# Altium PCB pv-simulator.PCBDOC
Units mm, origin at the board's own origin, x right, y up, seen from the top; angles counter-clockwise.
Board outline 60 x 60 mm, 2 copper layers (Top Layer, Bottom Layer); 122 components, 101 nets, 425 pads, 502 vias.
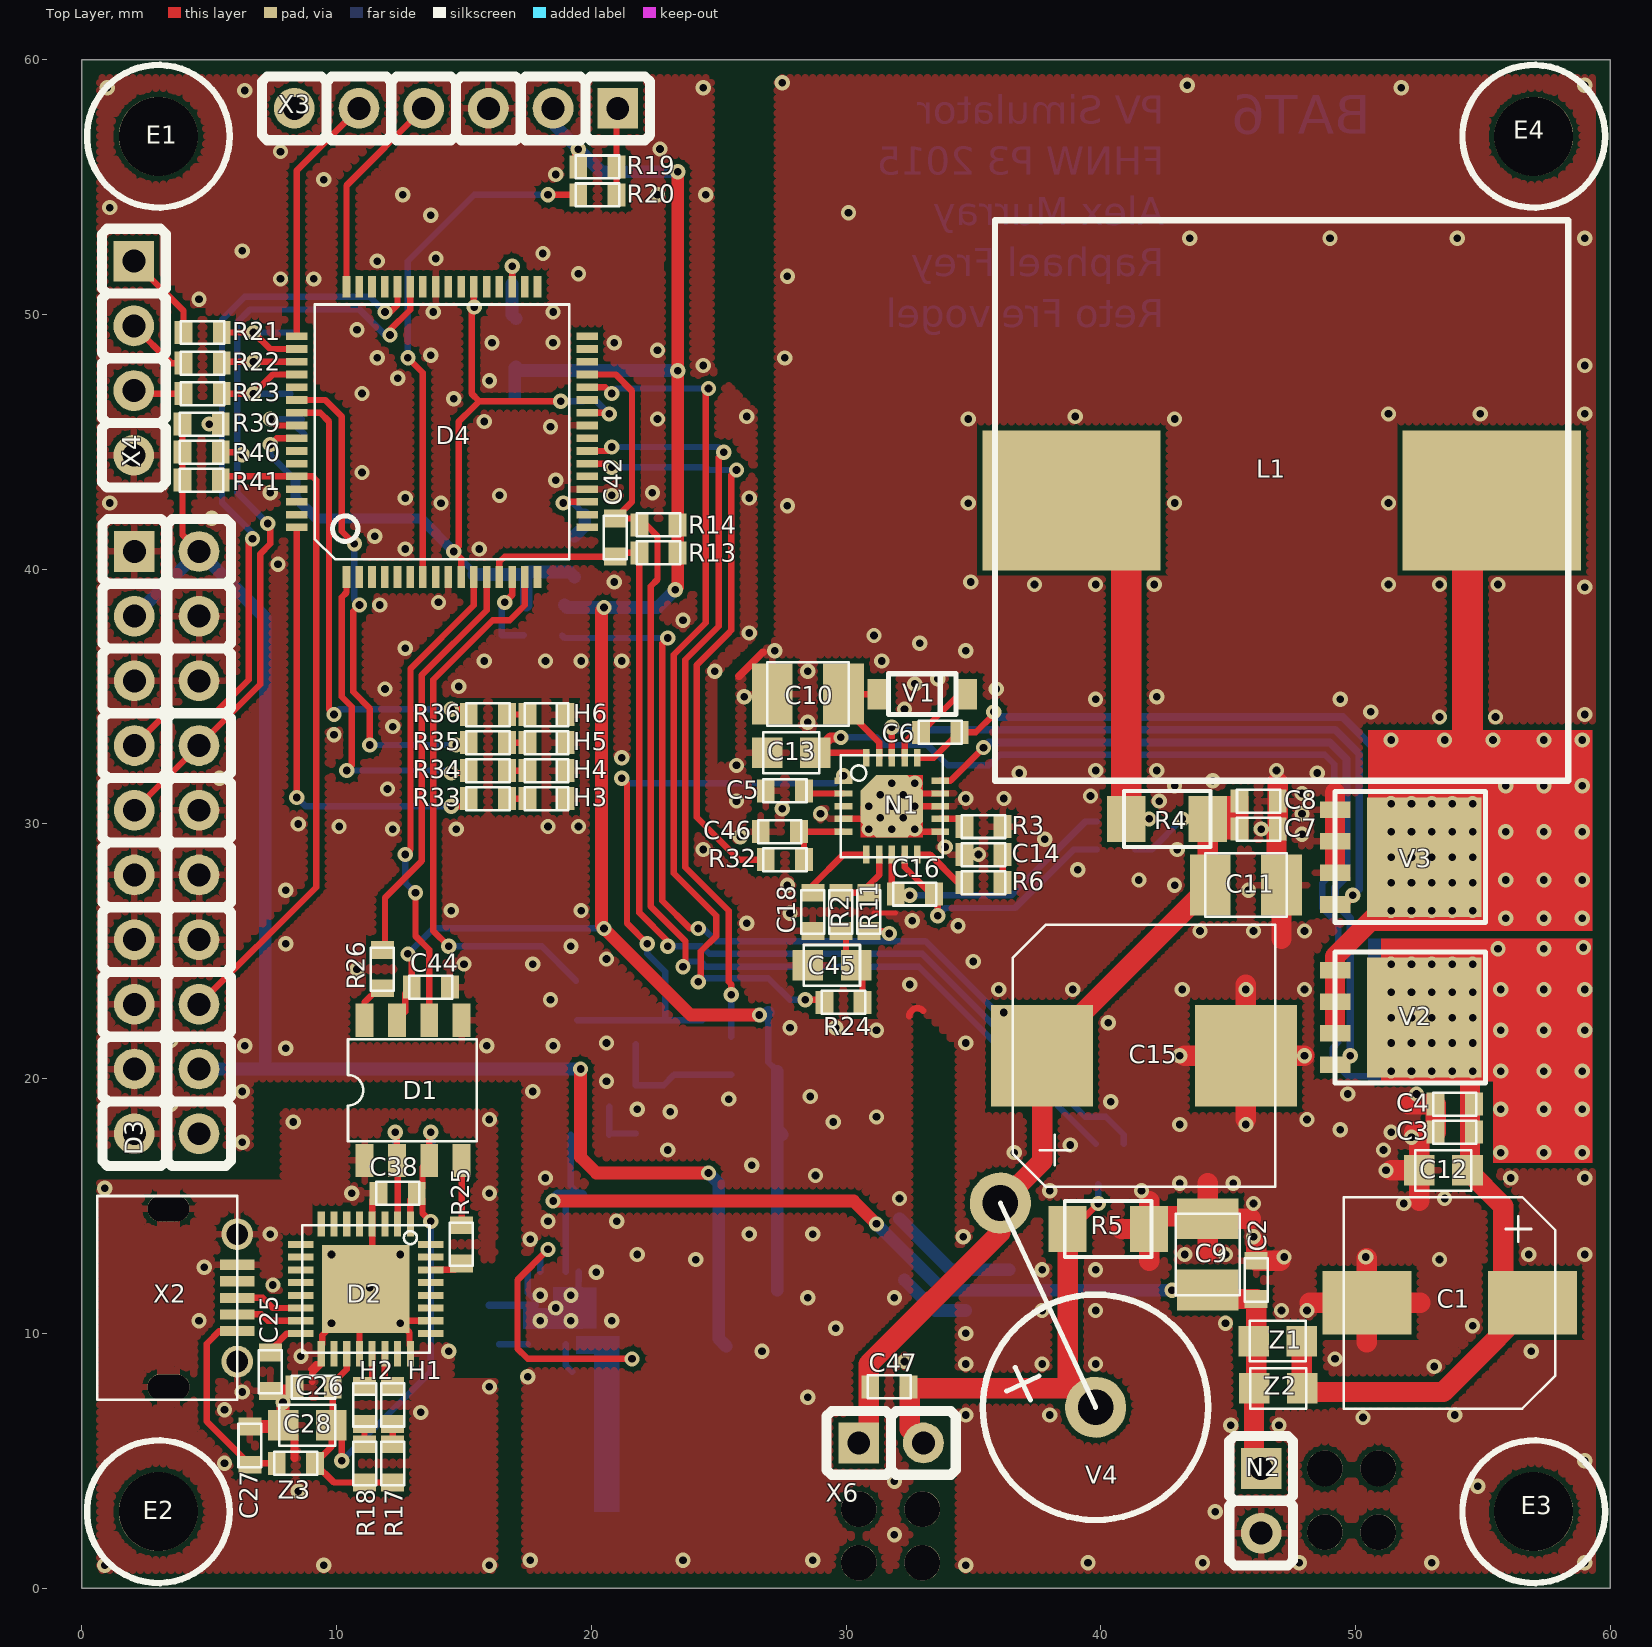
[diagram p0: Top Layer view]
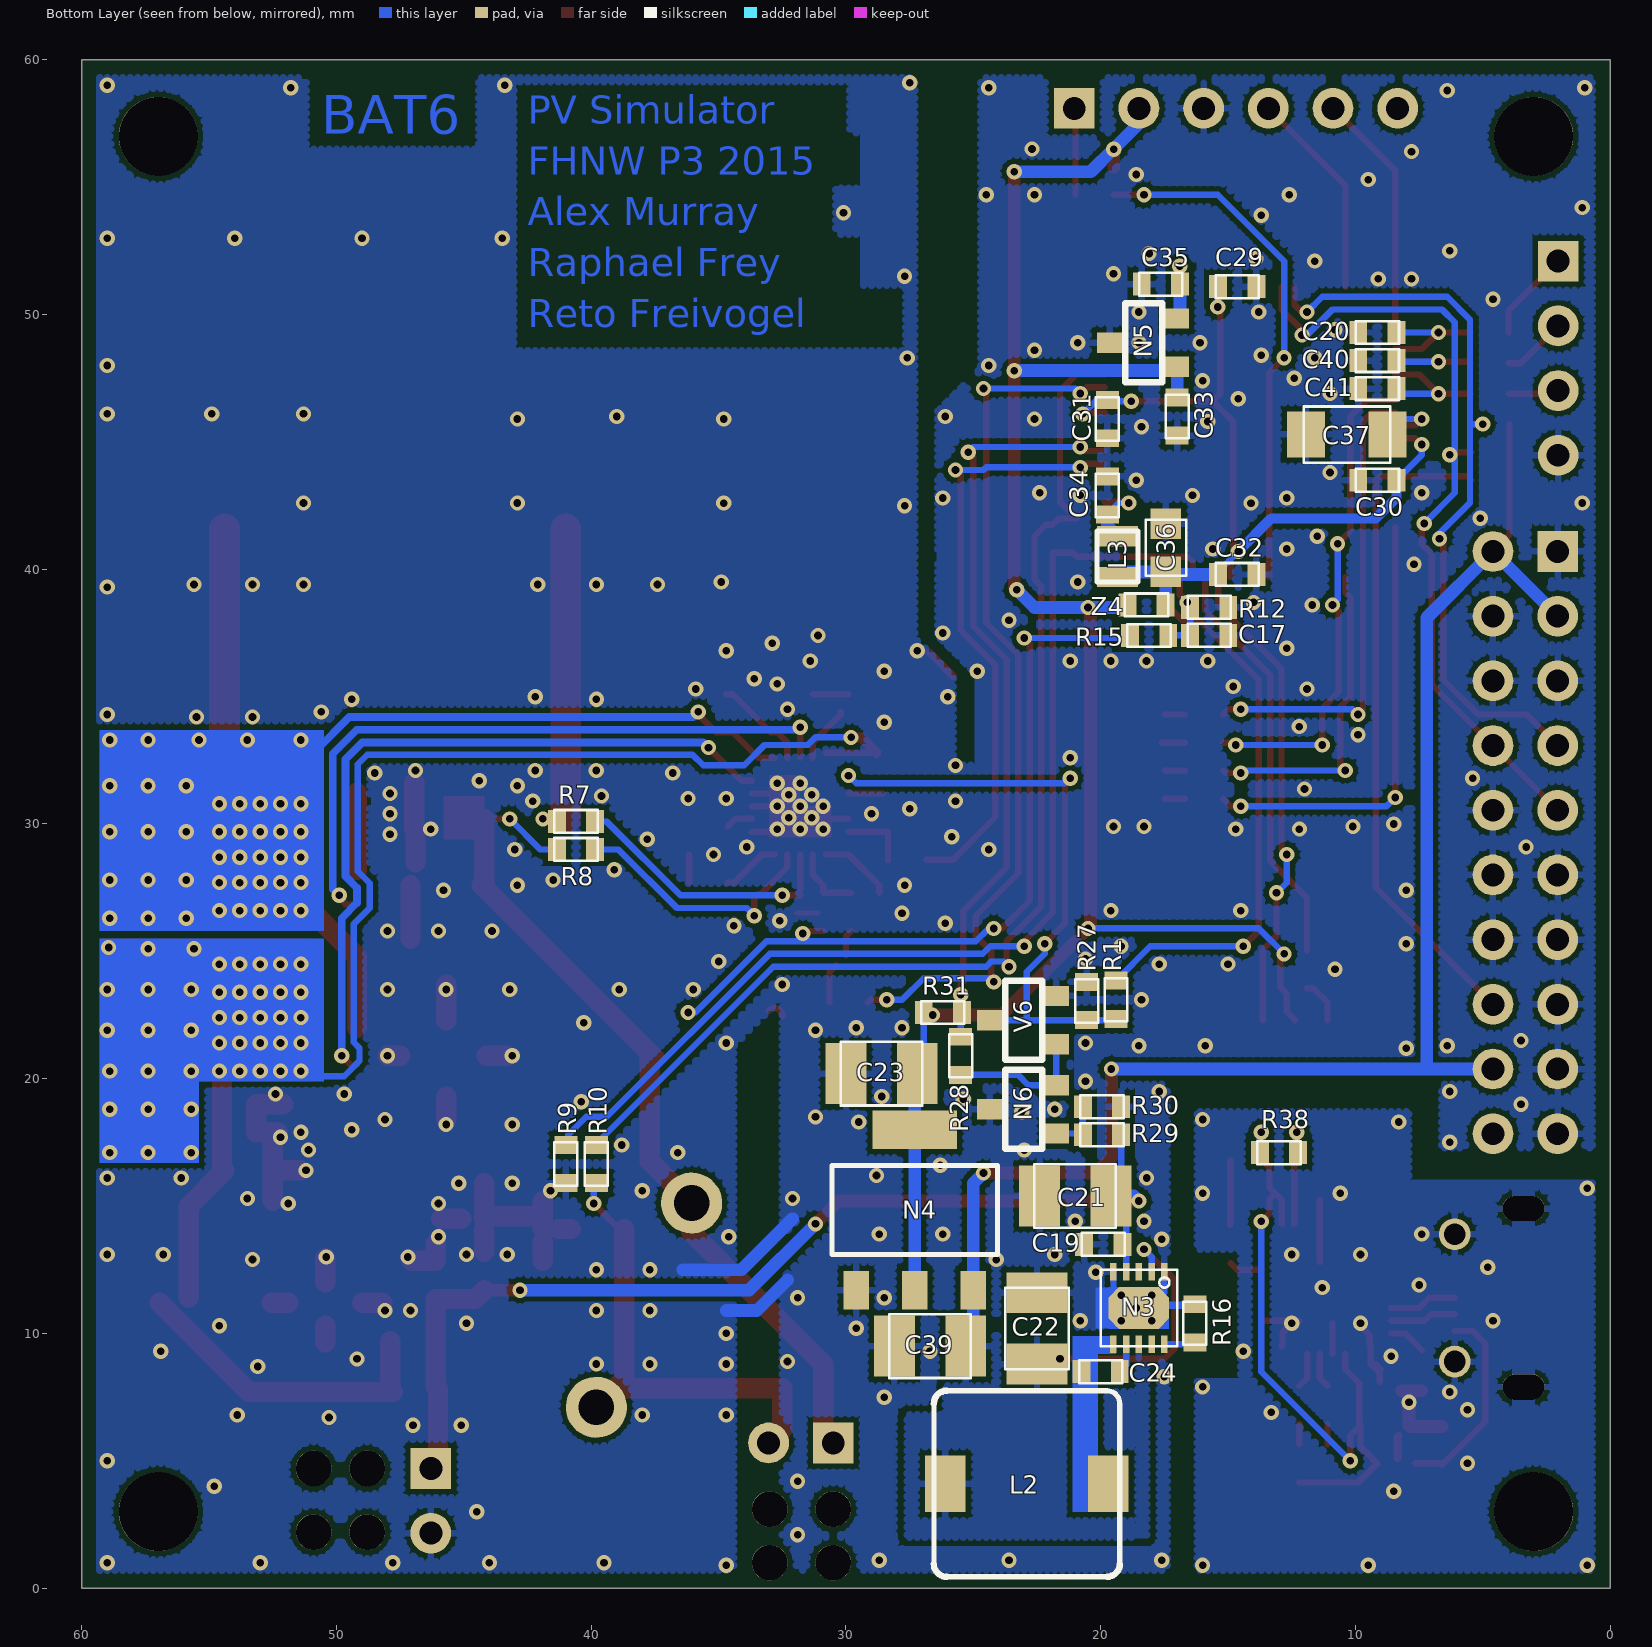
[diagram p1: Bottom Layer view, seen from below]

## Layer stack, top to bottom
Top Layer: signal copper 0.0356
Dielectric: dielectric 0.32, FR-4, Dk 4.8
Bottom Layer: signal copper 0.0356

## Board outline
0,0 60,0 60,60 0,60

## Design rules (kind name [scope] priority, off if disabled: settings)
Clearance [All] p1: gap=0.2
ComponentClearance [All] p1: gap=0.1 collisioncheckmode=0
ComponentOrientations [All] p1: allowedrotations=32
HoleSize [All] p1: absolutevalues=TRUE maxlimit=4 minlimit=0.3 maxpercent=80.000 minpercent=20.000
PolygonConnect [All] p1: connectstyle=Relief reliefconductorwidth=0.254 reliefentries=4 polygonreliefangle="90 Angle"
RoutingLayers [All] p1: top layer=Horizontal bottom layer=Vertical
RoutingVias [All] p1: holewidth=0.3 width=0.6 viastyle="Through Hole" minholewidth=0.3 minwidth=0.6 maxholewidth=0.3 maxwidth=0.6
SolderMaskExpansion [All] p1: expansion=0.102
TestPointUsage [All] p1: valid=0 allowmultiple=FALSE
Testpoint [All] p1: side=15 testpointundercomponent=TRUE minsize=1.016 maxsize=2.54 preferedsize=1.524 minholesize=0 maxholesize=1.016 preferedholesize=0.813 testpointgrid=0.025 style=1023 order=1234567890
Width [All] p1: maxlimit=1.2 minlimit=0.15 preferedwidth=0.2 toplayer_prefwidth=0.25 bottomlayer_prefwidth=0.25 minimp=50.000000 maximp=50.000000 favimp=50.000000
15 further rules are at their usual default settings.

## Classes and differential pairs
component class PV-Simulator: E1 E2 E3 E4 U1
component class uC: C20 C29 C30 C31 C32 C33 C34 C35 C36 C37 C40 C41 D3 D4 H3 H4 H5 H6 L3 N5 R19 R20 R21 R22 R23 R33 R34 R35 R36 R39 R40 R41 X3 X4 Z4
component class UART: C25 C26 C27 C28 C38 C44 D1 D2 H1 H2 R17 R18 R25 R26 R38 X2 Z3
component class Rails: C19 C21 C22 C23 C24 C39 L2 N2 N3 N4 R16 X1 X7
component class Buck: C1 C2 C3 C4 C5 C6 C7 C8 C9 C10 C11 C12 C13 C14 C15 C16 C17 C18 C42 C45 C46 C47 L1 N1 N6 R1 R2 R3 R4 R5 R6 R7 R8 R9 R10 R11 R12 R13 R14 R15 R24 R27 R28 R29 R30 R31 R32 R? V1 V2 V3 V4 V6 X6 Z1 Z2

## Components (designator, comment, footprint, x,y, rotation, side; value= is the part's Value field where it differs from the comment)
C1 "C_SMD_ALU_47U_50V_20%_PCV1H470MCL7GS" SMD_CAP_CV_8x10L 53.7,11.2 r270 top
C2 "C_SMD_CER_100N_50V_10%_X7R_0603" SMD_0603 46.1,12.1 r270 top
C3 "C_SMD_CER_100N_50V_10%_X7R_0603" SMD_0603 53.9,17.9 r0 top
C4 "C_SMD_CER_100N_50V_10%_X7R_0603" SMD_0603 53.9,19 r0 top
C5 "C_SMD_CER_100N_50V_10%_X7R_0603" SMD_0603 27.6,31.3 r180 top
C6 "C_SMD_CER_100N_50V_10%_X7R_0603" SMD_0603 33.7,33.6 r0 top
C7 "C_SMD_CER_100N_50V_10%_X7R_0603" SMD_0603 46.2,29.8 r180 top
C8 "C_SMD_CER_100N_50V_10%_X7R_0603" SMD_0603 46.2,30.9 r180 top
C9 "C_SMD_CER_10U_50V_10%_X7R_1210" SMD_1210 44.2,13.1 r270 top
C10 "C_SMD_CER_10U_50V_10%_X7R_1210" SMD_1210 28.5,35.1 r180 top
C11 "C_SMD_CER_10U_50V_10%_X7R_1210" SMD_1210 45.7,27.6 r180 top
C12 "C_SMD_CER_1U_50V_10%_X7R_0805" SMD_0805 52.5,16.4 r0 top
C13 "C_SMD_CER_1U_50V_10%_X7R_0805" SMD_0805 28.8,32.8 r180 top
C14 "C_SMD_CER_4N7_50V_10%_X7R_0603" SMD_0603 35.4,28.8 r0 top
C15 "C_SMD_ALU_100U_50V_20%_PCV1H101MCL2GS" SMD_CAP_CV_10x12.7L 41.7,20.9 r90 top
C16 "C_SMD_CER_33N_50V_10%_X7R_0603" SMD_0603 32.7,27.25 r180 top
C17 "C_SMD_CER_3N3_50V_10%_X7R_0603" SMD_0603 15.74,37.404 r0 bottom
C18 "C_SMD_CER_47N_50V_10%_X7R_0603" SMD_0603 28.7,26.55 r90 top
C19 "C_SMD_CER_100N_50V_10%_X7R_0603" SMD_0603 19.901,13.498 r180 bottom
C20 "C_SMD_CER_100N_50V_10%_X7R_0603" SMD_0603 9.14,49.296 r180 bottom
C21 "C_SMD_CER_10U_50V_10%_X7R_1210" SMD_1210 21.001,15.398 r180 bottom
C22 "C_SMD_CER_10U_50V_10%_X7R_1210" SMD_1210 22.501,10.198 r270 bottom
C23 "C_SMD_CER_10U_50V_10%_X7R_1210" SMD_1210 28.6,20.199 r180 bottom
C24 "C_SMD_CER_470N_50V_10%_X7R_0603" SMD_0603 20.001,8.498 r180 bottom
C25 "C_SMD_CER_100N_50V_10%_X7R_0603" SMD_0603 7.399,8.496 r90 top
C26 "C_SMD_CER_100N_50V_10%_X7R_0603" SMD_0603 9.099,7.896 r0 top
C27 "C_SMD_CER_10N_50V_10%_X7R_0603" SMD_0603 6.599,5.596 r270 top
C28 "C_SMD_CER_10U_16V_10%_X5R_0805" SMD_0805 7.899,6.396 r0 top
C29 "C_SMD_CER_100N_50V_10%_X7R_0603" SMD_0603 14.64,51.096 r0 bottom
C30 "C_SMD_CER_100N_50V_10%_X7R_0603" SMD_0603 9.14,43.496 r180 bottom
C31 "C_SMD_CER_100N_50V_10%_X7R_0603" SMD_0603 19.74,45.896 r90 bottom
C32 "C_SMD_CER_100N_50V_10%_X7R_0603" SMD_0603 14.64,39.796 r0 bottom
C33 "C_SMD_CER_100N_50V_10%_X7R_0603" SMD_0603 17,46 r90 bottom
C34 "C_SMD_CER_100N_50V_10%_X7R_0603" SMD_0603 19.74,42.896 r270 bottom
C35 "C_SMD_CER_10N_50V_10%_X7R_0603" SMD_0603 17.64,51.196 r180 bottom
C36 "C_SMD_CER_10U_16V_10%_X5R_0805" SMD_0805 17.44,41.796 r270 bottom
C37 "C_SMD_CER_22U_6V3_20%_X5R_1206" SMD_1206 12.04,45.296 r180 bottom
C38 "C_SMD_CER_100N_50V_10%_X7R_0603" SMD_0603 12.399,15.496 r0 top
C39 "C_SMD_CER_10U_50V_10%_X7R_1210" SMD_1210 26.7,9.499 r180 bottom
C40 "C_SMD_CER_100N_50V_10%_X7R_0603" SMD_0603 9.14,48.196 r180 bottom
C41 "C_SMD_CER_100N_50V_10%_X7R_0603" SMD_0603 9.14,47.096 r180 bottom
C42 "C_SMD_CER_6N8_50V_10%_X7R_0603" SMD_0603 20.94,41.246 r270 top
C44 "C_SMD_CER_100N_50V_10%_X7R_0603" SMD_0603 13.699,23.596 r180 top
C45 "C_SMD_CER_3U3_35V_10%_X7R_0805" SMD_0805 28.5,24.45 r0 top
C46 "C_SMD_CER_3N3_50V_10%_X7R_0603" SMD_0603 27.4,29.7 r0 top
C47 "C_SMD_CER_100N_50V_10%_X7R_0603" SMD_0603 31.7,7.9 r180 top
D1 "D_ACSL-6210_SO-8" SMD_SOP_8 11.099,22.296 r0 top
D2 "D_FT232RQ" SMD_QFN-32 12.898,14.296 r270 top
D3 "D_LCD_80CHAR_20X4_NHD-0420CW-AR3" THT_CON_P2.54_D0.9_2X10 4.6,40.7 r270 top
D4 "D_DSPIC33EP16GS506_TQFP-64" SMD_TQFP-64 14.14,45.396 r90 top
E1 "E_STANDOFF_20MM_M3_PLASTIC" THT_STANDOFF_20MM_M3 3,57 r0 top
E2 "E_STANDOFF_20MM_M3_PLASTIC" THT_STANDOFF_20MM_M3 3,3 r0 top
E3 "E_STANDOFF_20MM_M3_PLASTIC" THT_STANDOFF_20MM_M3 57,3 r0 top
E4 "E_STANDOFF_20MM_M3_PLASTIC" THT_STANDOFF_20MM_M3 57,57 r0 top
H1 "H_SMD_LED_BLUE_0603" SMD_0603P 12.199,7.196 r90 top
H2 "H_SMD_LED_BLUE_0603" SMD_0603P 11.099,7.196 r90 top
H3 "H_SMD_LED_BLUE_0603" SMD_0603P 18.24,30.996 r0 top
H4 "H_SMD_LED_BLUE_0603" SMD_0603P 18.24,32.096 r0 top
H5 "H_SMD_LED_BLUE_0603" SMD_0603P 18.24,33.196 r0 top
H6 "H_SMD_LED_BLUE_0603" SMD_0603P 18.24,34.296 r0 top
L1 "L_SMD_22U_15A_7MOHM_20%_74435582200" SMD_INDUCT-74435582200 47.1,42.7 r90 top
L2 "L_SMD_10U_2A_20%_IND_74477710" SMD_INDUCT_74477710 19.701,4.098 r0 bottom
L3 "L_SMD_4U7_1A_20%_0806" SMD_0806 19.34,39.696 r90 bottom
N1 "N_LT3741EUF_QFN-20" SMD_QFN-20 31.8,30.7 r270 top
N2 "N_EXT_ACDC_36V_75W" THT_CON_P2.54_D0.9_1X2 46.3,4.7 r270 top
N3 "N_LT3973-5_DFN-10" SMD_DFN_10_3X3 18.501,10.998 r0 bottom
N4 "N_AP2114H-3.3_SOT223" SMD_SOT_22_3 27.301,11.698 r180 bottom
N5 "N_UREF_1V5_0A007_52UVRMS_ISL21080CIH315Z_SOT-23-3" SMD_SOT_23_3 18.34,48.896 r90 bottom
N6 "N_TLVH431_SOT23-3" SMD_SOT_23_3 23.05,18.799 r90 bottom
R1 "R_SMD_THINFILM_4K7_0W1_1%_50PPM_0603" SMD_0603 19.4,23.1 r270 bottom
R2 "R_SMD_THINFILM_10K_0W1_1%_50PPM_0603" SMD_0603 29.8,26.55 r270 top
R3 "R_SMD_THINFILM_43K_0W1_0.1%_25PPM_0603" SMD_0603 35.4,29.9 r180 top
R4 "R_SMD_THICKFILM_0E01_0W5_0.5%_50PPM_1206" SMD_1206 40.9,30.2 r0 top
R5 "R_SMD_THICKFILM_0E01_0W5_0.5%_50PPM_1206" SMD_1206 42,14.1 r180 top
R6 "R_SMD_THINFILM_47K_0W1_1%_50PPM_0603" SMD_0603 35.4,27.7 r180 top
R7 "R_SMD_THINFILM_10E_0W1_1%_50PPM_0603" SMD_0603 40.6,30.1 r0 bottom
R8 "R_SMD_THINFILM_10E_0W1_1%_50PPM_0603" SMD_0603 40.6,29 r0 bottom
R9 "R_SMD_THINFILM_4K7_0W1_1%_50PPM_0603" SMD_0603 40.999,16.65 r90 bottom
R10 "R_SMD_THINFILM_4K7_0W1_1%_50PPM_0603" SMD_0603 39.799,16.65 r90 bottom
R11 "R_SMD_THINFILM_180K_0W1_0.1%_25PPM_0603" SMD_0603 30.9,26.55 r270 top
R12 "R_SMD_THINFILM_10K_0W1_1%_50PPM_0603" SMD_0603 15.74,38.504 r0 bottom
R13 "R_SMD_THINFILM_4K7_0W1_1%_50PPM_0603" SMD_0603 22.64,40.646 r0 top
R14 "R_SMD_THINFILM_4K7_0W1_1%_50PPM_0603" SMD_0603 22.64,41.746 r0 top
R15 "R_SMD_THINFILM_150K_0W1_1%_50PPM_0603" SMD_0603 18.1,37.4 r0 bottom
R16 "R_SMD_THINFILM_100E_0W1_1%_50PPM_0603" SMD_0603 16.301,10.398 r270 bottom
R17 "R_SMD_THINFILM_100E_0W1_1%_50PPM_0603" SMD_0603 12.199,4.896 r270 top
R18 "R_SMD_THINFILM_100E_0W1_1%_50PPM_0603" SMD_0603 11.099,4.896 r270 top
R19 "R_SMD_THINFILM_10K_0W1_1%_50PPM_0603" SMD_0603 20.24,55.796 r180 top
R20 "R_SMD_THINFILM_470E_0W1_1%_50PPM_0603" SMD_0603 20.24,54.696 r180 top
R21 "R_SMD_THINFILM_100E_0W1_1%_50PPM_0603" SMD_0603 4.74,49.296 r180 top
R22 "R_SMD_THINFILM_100E_0W1_1%_50PPM_0603" SMD_0603 4.74,48.096 r180 top
R23 "R_SMD_THINFILM_100E_0W1_1%_50PPM_0603" SMD_0603 4.74,46.896 r180 top
R24 "R_SMD_THINFILM_10E_0W1_1%_50PPM_0603" SMD_0603 29.9,23 r0 top
R25 "R_SMD_THINFILM_270E_0W1_1%_50PPM_0603" SMD_0603 14.9,13.5 r90 top
R26 "R_SMD_THINFILM_150E_0W1_1%_50PPM_0603" SMD_0603 11.8,24.299 r90 top
R27 "R_SMD_THINFILM_100K_0W1_1%_50PPM_0603" SMD_0603 20.55,23.049 r270 bottom
R28 "R_SMD_THINFILM_47K_0W1_1%_50PPM_0603" SMD_0603 25.5,20.899 r90 bottom
R29 "R_SMD_THINFILM_180K_0W1_0.1%_25PPM_0603" SMD_0603 19.95,17.799 r180 bottom
R30 "R_SMD_THINFILM_10K_0W1_1%_50PPM_0603" SMD_0603 19.95,18.899 r0 bottom
R31 "R_SMD_THINFILM_4K7_0W1_1%_50PPM_0603" SMD_0603 26.2,22.599 r0 bottom
R32 "R_SMD_THINFILM_10K_0W1_1%_50PPM_0603" SMD_0603 27.6,28.6 r0 top
R33 "R_SMD_THINFILM_33E_0W1_1%_50PPM_0603" SMD_0603 15.94,30.996 r0 top
R34 "R_SMD_THINFILM_33E_0W1_1%_50PPM_0603" SMD_0603 15.94,32.096 r0 top
R35 "R_SMD_THINFILM_33E_0W1_1%_50PPM_0603" SMD_0603 15.94,33.197 r0 top
R36 "R_SMD_THINFILM_33E_0W1_1%_50PPM_0603" SMD_0603 15.94,34.297 r0 top
R38 "R_SMD_THINFILM_10K_0W1_1%_50PPM_0603" SMD_0603 13,17.1 r0 bottom
R39 "R_SMD_THINFILM_10K_0W1_1%_50PPM_0603" SMD_0603 4.7,45.7 r180 top
R40 "R_SMD_THINFILM_10K_0W1_1%_50PPM_0603" SMD_0603 4.7,44.6 r180 top
R41 "R_SMD_THINFILM_10K_0W1_1%_50PPM_0603" SMD_0603 4.7,43.5 r180 top
V1 "V_SMD_SCHOTTKY_MBR0540T1G_40V_0A5_SOD-123" SMD_SOD_123 31.3,35.1 r0 top
V2 "V_SMD_FET_NMOS_BSC093N04LS_40V_13A_24NC_0E0093_PG-TDSON-8" SMD_PG-TDSON-8 52.7,22.4 r270 top
V3 "V_SMD_FET_NMOS_BSC093N04LS_40V_13A_24NC_0E0093_PG-TDSON-8" SMD_PG-TDSON-8 52.7,28.7 r270 top
V4 "V_THT_DIODE_6A05-T_50V_6A" THT_6A05-T_2 39.8,7.1 r115 top
V6 "V_SMD_TRANS_NPN_BC847B_50V_0A2_SOT-23-3" SMD_SOT_23_3 23.05,22.299 r90 bottom
X2 "X_SMD_USB_MICRO-B_2.0" SMD_USB_MICRO_B_2.0 3.399,11.396 r270 top
X3 "X_CONNECTOR_P2.54_D0.9_1X6" THT_CON_P2.54_D0.9_1X6 21.04,58.096 r180 top
X4 "X_CONNECTOR_P2.54_D0.9_1X4" THT_CON_P2.54_D0.9_1X4 2.04,52.096 r270 top
X6 "X_CONNECTOR_P2.54_D0.9_1X2" THT_CON_P2.54_D0.9_1X2 30.5,5.7 r0 top
Z1 "Z_SMD_FERRITE_5A_60E@100MHZ_0805" SMD_0805 47.9,9.7 r180 top
Z2 "Z_SMD_FERRITE_5A_60E@100MHZ_0805" SMD_0805 47.92,7.84 r180 top
Z3 "Z_SMD_FERRITE_1A5_470E@100MHZ_0603" SMD_0603 8.399,4.896 r0 top
Z4 "Z_SMD_FERRITE_1A5_470E@100MHZ_0603" SMD_0603 18.2,38.6 r0 bottom

## Footprints (in the part's own frame and the unit in brackets; to place one, negate y for a bottom-side part, rotate by r counter-clockwise, add the part's x,y. Pads: shape width x height; smd on the part's side, far side on the other; paste and mask are expansions set on the pad)
SMD_0603 [mm] "SMD_0603"
  rect 0.7x0.9 smd: 1(-0.75,0) 2(0.75,0)
  silkscreen extent -0.85,-0.45 0.85,0.45
SMD_0603P [mm] "SMD_0603P"
  rect 0.7x0.9 smd: 1(-0.75,0) 2(0.75,0)
  silkscreen extent -0.85,-0.45 0.85,0.45
SMD_0805 [mm] "SMD_0805"
  rect 1.2x1.2 smd: 1(0,0) 2(1.9,0)
  silkscreen extent -0.15,-0.8 2.05,0.8
SMD_0806 [mm] "SMD_0806"
  rect 0.8x1.6 smd: 1(0,0) 2(1.6,0)
  silkscreen extent -0.2,-0.8 1.8,0.8
SMD_1206 [mm] "SMD_1206"
  rect 1.5x1.8 smd: 1(0.1,0) 2(3.3,0)
  silkscreen extent 0.01,-1.1 3.41,1.1
SMD_1210 [mm] "SMD_1210"
  rect 1.6x2.4 smd: 1(-1.4,0) 2(1.4,0)
  silkscreen extent -1.6,-1.25 1.6,1.25
SMD_CAP_CV_8x10L [mm]
  rect 2.5x3.5 smd: 1(0,-3.25) 2(0,3.25)
  silkscreen extent -4.15,-4.15 4.15,4.15
SMD_CAP_CV_10x12.7L [mm]
  rect 4x4 smd: 1(0,-4) 2(0,4)
  silkscreen extent -5.15,-5.15 5.15,5.15
SMD_DFN_10_3X3 [mm]
  rect 0.25x0.7 smd: 1(-1,-1.425) 2(-0.5,-1.425) 3(0,-1.425) 4(0.5,-1.425) 5(1,-1.425) 6(1,1.425) 7(0.5,1.425) 8(0,1.425) 9(-0.5,1.425) 10(-1,1.425)
  oct 2.38x1.65 smd: 11(0,0)
  Top Layer region: -1.191,0.825 -0.001,0.825 -0.001,0 -1.191,0
  Top Layer region: -0.001,0.825 1.189,0.825 1.189,0 -0.001,0
  Top Layer region: 0.001,0 1.191,0 1.191,-0.825 0.001,-0.825
  silkscreen extent -1.5,-1.5 1.5,1.5
SMD_INDUCT-74435582200 [mm] "SMD_INDUCT-74435582200"
  rect 5.5x7 smd: 1(0,-8.25) 2(0,8.25)
  silkscreen extent -11,-11.25 11,11.25
SMD_INDUCT_74477710 [mm]
  rect 1.6x2.2 smd: 1(0,0) 2(6.4,0)
  silkscreen extent -0.45,-3.65 6.85,3.65
SMD_PG-TDSON-8 [mm] "alias: SuperSO8 or S2O8"
  rect 0.65x1.2 smd: 1(-1.86,-3.5) 2(-0.62,-3.5) 3(0.62,-3.5) 4(1.86,-3.5)
  rect 4.7x4.5 smd: 5(0,0)
  Top Layer region: 1.651,2 2.351,2 2.351,3 1.651,3
  Top Layer region: 0.314,2.001 1.014,2.001 1.014,3.001 0.314,3.001
  Top Layer region: -1.015,2 -0.315,2 -0.315,3 -1.015,3
  Top Layer region: -2.35,2.001 -1.65,2.001 -1.65,3.001 -2.35,3.001
  silkscreen extent -2.58,-3.5 2.58,2.4
SMD_QFN-20 [mm] "SMD_QFN-20"
  rect 0.25x0.7 smd: 1(-1,-1.9) 2(-0.5,-1.9) 3(0,-1.9) 4(0.5,-1.9) 5(1,-1.9) 11(1,1.9) 12(0.5,1.9) 13(0,1.9) 14(-0.5,1.9) 15(-1,1.9)
  rect 0.7x0.25 smd: 6(1.9,-1) 7(1.9,-0.5) 8(1.9,0) 9(1.9,0.5) 10(1.9,1) 16(-1.9,1) 17(-1.9,0.5) 18(-1.9,0) 19(-1.9,-0.5) 20(-1.9,-1)
  oct 2.45x2.45 smd: 21(0,0)
  Top Layer region: -0.001,0 1.224,0 1.224,1.225 -0.001,1.225
  Top Layer region: -1.225,0 0,0 0,1.225 -1.225,1.225
  Top Layer region: 0.002,-1.225 1.227,-1.225 1.227,0 0.002,0
  silkscreen extent -2,-2 2,2
SMD_QFN-32 [mm] "SMD_QFN-32"
  rect 1x0.28 smd mask+0.05: 1(0,0) 2(0,-0.5) 3(0,-1) 4(0,-1.5) 5(0,-2) 6(0,-2.5) 7(0,-3) 8(0,-3.5) 17(5.1,-3.5) 18(5.1,-3) 19(5.1,-2.5) 20(5.1,-2) 21(5.1,-1.5) 22(5.1,-1) 23(5.1,-0.5) 24(5.1,0)
  rect 0.28x1 smd mask+0.05: 9(0.8,-4.3) 10(1.3,-4.3) 11(1.8,-4.3) 12(2.3,-4.3) 13(2.8,-4.3) 14(3.3,-4.3) 15(3.8,-4.3) 16(4.3,-4.3) 25(4.3,0.8) 26(3.8,0.8) 27(3.3,0.8) 28(2.8,0.8) 29(2.3,0.8) 30(1.8,0.8) 31(1.3,0.8) 32(0.8,0.8)
  rect 3.45x3.45 smd: 33(2.55,-1.75)
  silkscreen extent 0.05,-4.25 5.05,0.75
SMD_SOD_123 [mm]
  rect 0.9x1.2 smd: 1(0,0) 2(3.4,0)
  silkscreen extent 0.37,-0.8 3.02,0.8
SMD_SOP_8 [mm] "SMD_SOP_8"
  rect 0.7x1.3 smd: 1(0,-5.5) 2(1.27,-5.5) 3(2.54,-5.5) 4(3.81,-5.5) 5(3.81,0) 6(2.54,0) 7(1.27,0) 8(0,0)
  silkscreen extent -0.65,-4.75 4.4,-0.75
SMD_SOT_22_3 [mm] "SMD_SOT_22_3"
  rect 1x1.5 smd: 1(-2.3,0) 2(0,0) 3(2.3,0)
  rect 3.3x1.5 smd: 4(0,6.3)
  silkscreen extent -3.25,1.4 3.25,4.9
SMD_SOT_23_3 [mm] "SMD_SOT_23_3"
  rect 0.8x1 smd: 1(-0.95,-1.3) 2(0.95,-1.3) 3(0,1.3)
  silkscreen extent -1.55,-0.75 1.55,0.7
SMD_TQFP-64 [mm]
  rect 0.85x0.3 smd: 1(-5.7,3.75) 2(-5.7,3.25) 3(-5.7,2.75) 4(-5.7,2.25) 5(-5.7,1.75) 6(-5.7,1.25) 7(-5.7,0.75) 8(-5.7,0.25) 9(-5.7,-0.25) 10(-5.7,-0.75) 11(-5.7,-1.25) 12(-5.7,-1.75) 13(-5.7,-2.25) 14(-5.7,-2.75) 15(-5.7,-3.25) 16(-5.7,-3.75) 33(5.7,-3.75) 34(5.7,-3.25) 35(5.7,-2.75) 36(5.7,-2.25) 37(5.7,-1.75) 38(5.7,-1.25) 39(5.7,-0.75) 40(5.7,-0.25) 41(5.7,0.25) 42(5.7,0.75) 43(5.7,1.25) 44(5.7,1.75) 45(5.7,2.25) 46(5.7,2.75) 47(5.7,3.25) 48(5.7,3.75)
  rect 0.3x0.85 smd: 17(-3.75,-5.7) 18(-3.25,-5.7) 19(-2.75,-5.7) 20(-2.25,-5.7) 21(-1.75,-5.7) 22(-1.25,-5.7) 23(-0.75,-5.7) 24(-0.25,-5.7) 25(0.25,-5.7) 26(0.75,-5.7) 27(1.25,-5.7) 28(1.75,-5.7) 29(2.25,-5.7) 30(2.75,-5.7) 31(3.25,-5.7) 32(3.75,-5.7) 49(3.75,5.7) 50(3.25,5.7) 51(2.75,5.7) 52(2.25,5.7) 53(1.75,5.7) 54(1.25,5.7) 55(0.75,5.7) 56(0.25,5.7) 57(-0.25,5.7) 58(-0.75,5.7) 59(-1.25,5.7) 60(-1.75,5.7) 61(-2.25,5.7) 62(-2.75,5.7) 63(-3.25,5.7) 64(-3.75,5.7)
  silkscreen extent -5,-5 5,5
SMD_USB_MICRO_B_2.0 [mm] "SMD_USB_MICRO_B_2.0"
  round 1 hole 1: 0(-3.5,-0.325) 0(-3.5,0.325) 0(-3.5,-0.162) 0(-3.5,0) 0(-3.5,0.162) 0(3.5,-0.325) 0(3.5,-0.163) 0(3.5,0) 0(3.5,0.162) 0(3.5,0.325)
  rect 0.4x1.35 smd: 1(-1.3,2.7) 2(-0.65,2.7) 3(0,2.7) 4(0.65,2.7) 5(1.3,2.7)
  round 1.25 hole 0.85: 6(-2.5,2.7) 6(2.5,2.7)
  silkscreen extent -4,-2.8 4,2.7
THT_6A05-T_2 [mm]
  round 2.4 hole 1.4: 1(0,0) 2(8.85,0)
  silkscreen extent -4.42,-4.42 8.85,4.42
THT_CON_P2.54_D0.9_1X2 [mm]
  rect 1.6x1.6 hole 0.9: 1(0,0)
  round 1.6 hole 0.9: 2(2.54,0)
  silkscreen extent -1.27,-1.25 3.81,1.25
THT_CON_P2.54_D0.9_1X4 [mm]
  rect 1.6x1.6 hole 0.9: 1(0,0)
  round 1.6 hole 0.9: 2(2.54,0) 3(5.08,0) 4(7.62,0)
  silkscreen extent -1.27,-1.25 8.89,1.25
THT_CON_P2.54_D0.9_1X6 [mm]
  rect 1.6x1.6 hole 0.9: 1(0,0)
  round 1.6 hole 0.9: 2(2.54,0) 3(5.08,0) 4(7.62,0) 5(10.16,0) 6(12.7,0)
  silkscreen extent -1.27,-1.25 13.97,1.25
THT_CON_P2.54_D0.9_2X10 [mm]
  rect 1.6x1.6 hole 0.9: 1(0,-2.54)
  round 1.6 hole 0.9: 2(0,0) 3(2.54,-2.54) 4(2.54,0) 5(5.08,-2.54) 6(5.08,0) 7(7.62,-2.54) 8(7.62,0) 9(10.16,-2.54) 10(10.16,0) 11(12.7,-2.54) 12(12.7,0) 13(15.24,-2.54) 14(15.24,0) 15(17.78,-2.54) 16(17.78,0) 17(20.32,-2.54) 18(20.32,0) 19(22.86,-2.54) 20(22.86,0)
  silkscreen extent -1.27,-3.79 24.13,1.25
THT_STANDOFF_20MM_M3 [mm]
  round 3.1 hole 3.1 unplated: 0(0,0)
  silkscreen extent -2.8,-2.8 2.8,2.8

## Part data
C2 C3 C4 C5 C6 C7 C8 C19 C20 C25 C26 C27 C28 C29 C30 C31 C32 C33 C34 C35 C36 C37 C38 C40 C41 C44 C47: "SMD Capacitor"
C9 C10 C11 C21 C22 C23 C39: "SMD Ceramic capacitor"
C14: "SMD Capacitor ceramic"
C17 C46: "Thinfilm Ceramic Capacitor"
C18: "SMD capacitor"
D1: "Multi-Channel and Bi-Directional 15MBd Digital Logic Gate Optocoupler"
D2: "FT232r USB UART IC"
E1 E2 E3 E4: "HEX STANDOFF M3 NYLON 20MM"
H1 H2 H3 H4 H5 H6: "Blue LED, 5mA"
L2 L3: "SMD Inductor"
N1: "High Power, CCVC, Step-Down Controller"
N3: library part N_LT3973-5_DFN-10-3x3, "42V, 750mA Step-Down Regulator with 2.5uA Quiescent Current and Integrated Diodes"
N4: "1A Low Noise CMOS LDO Regulator"
N6: "LOW-VOLTAGE ADJUSTABLE PRECISION SHUNT REGULATORS"
R1 R2 R3 R6 R7 R8 R9 R10 R11 R12 R13 R14 R15 R16 R17 R18 R19 R20 R21 R22 R23 R24 R25 R26 R27 R28 R29 R30 R31 R32 R33 R34 R35 R36 R38 R39 R40 R41: "SMD Resistor"
R4 R5: "SMD Current sense resistor"
V1: "Schottky diode, 40V, 500mA, SOD-123"
V2 V3: "Fast switching mosfet for SMPS"
V4: "6A05-T"
V6: "NPN Transistor"
X3: "Pitch 2.54, Diameter 0.9mm, 1 row, 6 columns"
X4: "Pitch 2.54, Diameter 0.9mm, 1 row, 4 columns"
X6: "Pitch 2.54, Diameter 0.9mm, 1 row, 2 columns"
Z1 Z2: "BEAD FERRITE 60 OHM 5A"
Z3 Z4: "FERRITE CHIP 470 OHM 1500MA 0603"

## Free pads (board coordinates)
  round 1.4 hole 1.4 unplated: 0(30.5,1) 0(30.5,3.1) 0(33,1) 0(33,3.1) 0(48.8,2.2) 0(48.8,4.7) 0(50.9,2.2) 0(50.9,4.7)

## Via types
v1: diameter 0.6, hole 0.3, Top Layer to Bottom Layer, 502 vias

## Nets (pads, with @x,y where several pads share a name; then routed paths per layer and width w, separated by ;. In a path a pad name is that pad's centre, name@x,y a point inside that pad or via, vN(x,y) a via of type N, cw(c..) or ccw(c..) an arc to the next point about the centre after c; other vN are vias at no path point)
+3.3V: C23.2 C33.2 C44.2 D1.7 N4.2 N4.4 N5.1 R13.2 R14.2 R19.2 R31.2 X3.2 Z4.2 | length 78.5
  Top Layer w0.25: D1.7 12.7,22.627 12.7,23.347 C44.2 12.949,24.751 v1(12.8,24.9)
  Top Layer w0.5: R19.2 v1(19.49,56.49) ; v1(20.5,38.5) 20.4,38.4 20.4,26 23.9,22.5 v1(26.6,22.5) ; v1(23.3,39.2) 23.39,39.29 v1(23.39,55.61) ; R14.2 R14.2@23.4,41.736
  Bottom Layer w0.25: v1(12.8,24.9) 13.8,25.9 v1(20.5,25.9) ; R31.2 26.95,20.649 C23.2@27.2,20.399
  Bottom Layer w0.5: C33.2 N5.1@17,47.906 ; N5.1 17.186,47.8 v1(23.39,47.8) ; X3.2 18.5,57.5 19.5,56.5 20.39,55.61 v1(23.39,55.61) ; Z4.2 19.05,38.5 22.6,38.5 v1(23.3,39.2) ; v1(26.6,22.5) 26.851,22.5 R31.2 ; N4.2 C23.2@27.301,20.298 ; N4.4 N4.4@27.5,17.799
+5V: C22.2 C39.2 D3.2 D3.3 D3.18 L2.2 N3.2 N3.8 N4.3 R39.2 R40.2 R41.2 | length 71.2
  Top Layer w0.25: R39.2 3.95,41.35 D3.2 ; v1(18.301,13.299) 17.101,12.099 17.101,9.399 17.501,8.999 v1(21.601,8.999)
  Top Layer w0.5: v1(19.58,20.38) 19.58,16.92 20.2,16.3 v1(24.6,16.3)
  Bottom Layer w0.25: N3.2 18.001,12.999 v1(18.301,13.299)
  Bottom Layer w0.5: D3.3 D3.2 ; D3.18 v1(19.58,20.38) ; D3.2@4.7,40.7 D3.2 ; 7.2,20.38 7.2,38.1 D3.2 ; v1(24.6,16.3) 25.001,15.899 25.001,9.798 C39.2
+5VI: C26.2 C28.2 C38.2 D1.3 D2.1 D2.19 R17.2 R18.2 R38.2 Z3.2 | length 26.7
  Top Layer w0.25: C28.2@9.849,6.346 9.849,8.046 10.398,8.595 D2.19 ; v1(10.2,4.998) 10.2,5.995 C28.2 9.799,5.546 Z3.2 9.899,4.146 R17.2 ; D2.1 12.898,15.245 13.374,15.721 13.374,16.531 D1.3 13.639,17.839 v1(13.7,17.9) ; C38.2 13.374,15.271 13.374,14.724 v1(13.7,14.398)
  Bottom Layer w0.25: v1(10.2,4.998) 13.7,8.498 v1(13.7,14.398) ; v1(13.7,17.9) 13.75,17.85 R38.2
+36V: C2.2 C9.2 C19.2 C21.2 N2.1 N3.4 R29.2 Z1.2 Z2.2 | length 42.2
  Top Layer w0.5: v1(18.5,15.2) 30.3,15.2 v1(31.2,14.3) ; v1(42.8,11.7) C9.2
  Top Layer w0.8: C9.2 44.55,11.35 C2.2 Z2.2@46.1,7.92 ; Z2.2 46.02,4.98 N2.1
  Bottom Layer w0.25: N3.4 C21.2@19.001,14.998 ; R29.2 19.2,15.799 C21.2
  Bottom Layer w0.5: v1(18.5,15.2) 18.698,15.398 C21.2 ; v1(31.2,14.3) 33.8,11.7 v1(42.8,11.7)
/MCLR: D4.7 R20.2 | length 20.4
  Top Layer w0.25: v1(12.8,48.3) 13.39,47.71 D4.7 ; v1(18.3,54.7) R20.2@19.486,54.7
  Bottom Layer w0.25: v1(12.8,48.3) 12.8,52.1 15.4,54.7 v1(18.3,54.7)
BUCK_EN: D4.15 R1.1 | length 22.2
  Top Layer w0.25: v1(14.4,25.2) 13.8,25.8 13.8,35.664 16.136,38 16.8,38 17.39,38.59 D4.15
  Bottom Layer w0.25: v1(14.4,25.2) 18.05,25.2 R1.1
BUCK_IMEAS+: C42.1 D4.29 R10.2 R14.1 | length 46.1
  Top Layer w0.25: D4.29 20.954,47.646 21.6,47 21.6,42.656 C42.1 21.64,41.996 R14.1 22.154,41.746 22.6,41.3 22.6,39.6 22.34,39.34 22.34,26.76 23.7,25.4 23.7,24.5 v1(23.6,24.4)
  Bottom Layer w0.25: v1(23.6,24.4) 23.8,24.6 24.3,24.6 24.5,24.4 32.85,24.4 R10.2@39.8,17.45
BUCK_IMEAS-: C42.2 D4.13 R9.2 R13.1 | length 43.5
  Top Layer w0.25: D4.13 16.39,40.29 16.596,40.496 C42.2 21.09,40.646 R13.1 21.89,26.51 23,25.4 v1(23,25.2)
  Bottom Layer w0.25: v1(23,25.2) 24.336,25.2 24.636,24.9 32.986,24.9 39.386,18.5 40.2,18.5 40.899,17.801 R9.2@40.899,17.45
BUCK_ISET: D4.22 R32.1 | length 23.5
  Top Layer w0.25: D4.22 20.546,44.146 v1@20.692,44 ; v1(25.7,43.9) 25.5,43.7 25.5,37.6 25.4,37.5 24.14,36.24 24.14,30.26 25.8,28.6 R32.1
  Bottom Layer w0.25: v1(20.8,44) 24.5,44 24.6,43.9 v1(25.7,43.9)
BUCK_UMEAS: C17.2 D4.14 R12.2 R15.1 | length 3.1
  Top Layer w0.25: v1(16.6,38.7) 16.89,38.99 D4.14
  Bottom Layer w0.25: R12.2 C17.2 R15.1@17.346,37.404
BUCK_USET: D4.28 R24.1 | length 35.2
  Top Layer w0.25: D4.28 20.554,47.146 v1(20.8,46.9) ; v1(24.2,23.8) 24.3,23.9 24.3,25 24.9,25.6 24.9,26.4 23.24,28.06 23.24,36.64 24.5,37.9 24.5,47 v1(24.6,47.1) ; v1(28.4,23.1) 29.05,23.1 R24.1
  Bottom Layer w0.25: v1(20.8,46.9) 21,47.1 v1(24.6,47.1) ; v1(24.2,23.8) 24.35,23.95 26.95,23.95 27.8,23.1 v1(28.4,23.1)
BUCK_UVLO: D4.23 R28.2 R31.1 | length 29.8
  Top Layer w0.25: D4.23 20.646,44.646 v1(20.8,44.8) ; v1(25.2,44.6) 25,44.4 25,37.764 23.69,36.454 23.69,28.3 25.4,26.59 25.4,23.8 25.5,23.7 v1(25.5,23.3)
  Bottom Layer w0.25: v1(20.8,44.8) 25,44.8 v1(25.2,44.6) ; R28.2 v1(25.5,23.3)
GND: C1.1 C2.1 C3.1 C4.1 C5.2 C7.1 C8.1 C9.1 C10.2 C11.1 C12.1 C13.2 C14.1 C15.1 C17.1 C18.1 C19.1 C20.1 C21.1 C22.1 C23.1 C29.1 C30.1 C31.1 C32.1 C33.1 C34.1 C35.1 C36.1 C37.1 C39.1 C40.1 C41.1 C44.1 C45.1 C46.1 D1.5 D3.1 D3.4 D3.5 D3.6 D3.10 D3.11 D3.12 D3.13 D3.14 D3.15 D3.17 D3.19 D4.9 D4.20 D4.25 D4.41 H3.2 H4.2 H5.2 H6.2 N1.4 N1.11 N1.13 N1.14 N1.21 N2.2 N3.1 N3.5 N3.11 N4.1 N5.3 N6.3 R3.1 R5.1 R9.1 R12.1 R16.1 R27.1 R30.1 V3.1 V3.2 V3.3 V6.2 X3.3 X4.4 | length 48.8
  Top Layer w0.2: 31.1,26.5 31.95,26.5
  Top Layer w0.25: N1.4 N1.21@30.9,30.2 ; N1.21@32.6,29.7 N1.11 ; N1.21@32.9,30.7 N1.13 ; N1.21@32.9,31.2 N1.14
  Top Layer w0.254: 32.488,22.45 cw(c32.804,22.45) 33.035,22.666
  Top Layer w0.3: 25.8,35.8 26.739,36.739
  Top Layer w0.8: 40.8,14.1 R5.1@41.3,14.1 ; 41.9,12.851 R5.1@41.9,13.6 ; R5.1 41.9,15.2 ; R5.1@41.9,14.6 C9.1@43.7,14.6 ; v1@43.299,20.9 C15.1@44.1,20.9 ; 44.2,13.199 C9.1@44.2,14.1 ; C9.1 44.2,15.899 ; C9.1@45.1,14.5 45.899,14.5 ; v1@45.7,18.4 C15.1@45.7,19.3 ; C15.1@45.7,22.3 v1@45.7,23.701 ; v1@46.1,13.549 C2.1 v1@47.051,12.85 ; C11.1@46.9,28.5 C7.1@46.9,29.7 ; C7.1 46.95,31.649 ; 47.1,25.499 C11.1 ; C15.1@47.5,20.9 v1(48,20.9) ; 48.199,11.2 C1.1@49,11.2 ; V3.3@49.2,28.2 49.2,31.235 ; 50.45,9.649 C1.1@50.45,10.3 ; C1.1@50.45,12 v1@50.45,12.95 ; v1@51.399,16.4 C12.1 ; C1.1@51.9,11.2 52.55,11.2 ; 52.099,19 C4.1 C3.1 v1@52.299,17.9 ; 52.5,15.2 52.5,17.1 ; 52.5,17.2 52.5,17.85
  Bottom Layer w0.25: N3.1 17.501,11.599 N3.11@17.7,11.4 ; N3.11@19.5,11.6 N3.5
  Bottom Layer w0.3: R16.1@16,11.1 N3.11@17.8,11.1
  Bottom Layer w0.5: 32.1,14.5 34.1,12.5 36.4,12.5 ; 32.3,12.1 33.5,10.9 34.699,10.9
  other v1: 34.7,0.899 39.499,1 43.999,1 47.8,1 52.999,1 58.999,1 17.599,1.1 23.599,1.1 28.699,1.1 31.9,2.099 44.5,2.999 54.799,4 31.9,4.199 58.999,5 45.1,6.4 47,6.4 50.299,6.7 34.699,6.8 37.999,6.8 53.899,6.8 28.5,7.499 17.5,8.3 53.1,8.699 34.699,8.8 37.699,8.8 39.799,8.8 32.299,8.9 49.2,8.999 26.7,9.299 56.9,9.3 34.699,10 29.6,10.199 54.6,10.3 44.899,10.4 18,10.5 19.2,10.5 20.8,10.499 37.699,10.9 39.799,10.9 47.1,10.9 48.1,10.9 18.6,11 28.5,11.399 31.9,11.399 18,11.5 19.2,11.5 20.2,12.4 37.699,12.5 39.799,12.5 24.1,12.899 53.3,12.9 47.2,13 50.4,13 21.799,13.1 43.3,13.1 44.9,13.1 56.8,13.1 59,13.1 17.599,13.7 34.6,13.799 46,13.8 26.2,13.9 28.699,13.9 18.3,14.399 21,14.399 46,15.1 51.9,15.1 32.1,15.299 53.5,15.299 38,15.599 41.6,15.6 43.1,15.9 45.2,15.9 18.199,16.1 56.1,16.1 59,16.1 28.8,16.199 51.2,16.4 26.299,16.6 36.6,17.099 22.999,17.2 51.1,17.2 38.8,17.399 6.3,17.5 52.2,17.7 51.4,17.9 49.4,18 43.1,18.2 45.7,18.2 29.5,18.299 48.1,18.4 31.2,18.5 23.1,18.7 21.799,18.8 3.499,19 40.399,19.1 25.4,19.2 28.6,19.3 49.7,19.4 52.399,19.4 6.3,19.499 17.7,19.499 20.599,19.9 43.1,20.9 7.999,21.2 6.4,21.299 15.9,21.299 18.5,21.299 20.599,21.4 34.699,21.4 3.499,21.5 31.2,21.899 27.799,22 29.599,22 40.3,22.199 18.4,23.099 36,23.5 38.899,23.5 43.2,23.5 45.7,23.5 48,23.5 32.5,23.699 10.8,24.299 15,24.5 17.7,24.5 35,24.599 20.599,24.7 19.2,25.2 7.999,25.3 43.9,25.8 46,25.8 48,25.8 34.4,26 26.1,26.099 32.599,26.2 27.799,26.5 14.5,26.6 19.6,26.6 7.999,27.4 45.8,27.4 27.7,27.599 42.9,27.6 41.5,27.8 39.1,28.199 35.2,28.8 24.4,29 43,29 3.3,29.099 33.9,29.099 37.8,29.399 25.85,29.5 47.9,29.6 12.199,29.8 14.7,29.8 30.9,29.8 31.8,29.8 32.7,29.8 46.3,29.8 10.099,29.9 18.3,29.9 19.5,29.9 8.5,29.999 31.35,30.25 32.25,30.25 29,30.4 47.9,30.4 27.5,30.6 30.9,30.7 31.8,30.7 31.8,30.7 32.7,30.7 25.7,30.9 42.3,30.899 34.699,31 36.199,31 39.6,31.1 31.35,31.15 32.25,31.15 47.9,31.199 12,31.375 42.9,31.499 31.8,31.6 32.7,31.6 44.4,31.7 5.4,31.799 36.799,32 48.499,32 39.8,32.099 42.199,32.1 46.9,32.1 25.7,32.3 21.2,32.6 9.9,33.5 12.2,33.825 28.5,34 53.299,34.2 55.5,34.2 59,34.3 50.6,34.4 32.299,34.5 39.799,34.9 49.399,34.9 26,35 42.199,35 11.9,35.3 35.899,35.3 14.8,35.399 32.7,35.5 33.6,35.699 24.85,35.999 28.5,35.999 15.799,36.4 18.2,36.4 19.6,36.4 21.2,36.4 31.399,36.4 27.199,36.8 34.699,36.8 12.7,36.899 32.899,37.1 31.099,37.4 26.2,37.499 23.6,38 11.7,38.6 13.999,38.7 59,39.301 37.399,39.4 39.799,39.4 42.1,39.4 51.3,39.4 53.299,39.4 55.6,39.4 20.899,39.5 34.9,39.5 7.7,40.199 12.7,40.799 15.6,40.799 11.5,41.3 5.1,41.999 27.7,42.5 1.099,42.6 14.1,42.599 34.8,42.599 42.9,42.601 51.3,42.6 12.7,42.8 26.2,42.8 16.399,42.9 20.8,42.9 7.399,43 22.399,43 18.6,43.499 10.999,43.8 18.4,45.599 15.799,45.8 22.6,45.9 34.8,45.899 42.9,45.901 26.1,46 39,46 51.3,46.1 54.9,46.1 59,46.1 14.599,46.7 10.999,46.9 16,47.4 12.4,47.5 24.4,48 59,48.001 11.6,48.3 27.6,48.299 13.699,48.4 22.6,48.599 16.1,48.899 18.499,48.9 20.9,48.899 10.8,49.4 13.8,50.099 18.5,50.099 4.6,50.6 7.8,51.4 9.1,51.4 27.7,51.5 19.5,51.599 11.599,52.1 13.9,52.199 18.1,52.4 6.3,52.499 43.5,53 49.001,53 54,53 59,53 13.699,53.9 30.1,53.999 1.099,54.2 12.6,54.7 22.6,54.7 24.499,54.7 9.499,55.3 18.6,55.499 7.8,56.399 22.699,56.5 6.4,58.799 1,58.9 24.4,58.9 51.799,58.9 43.399,59 58.999,59 27.5,59.099
GNDI: C25.1 C26.1 C27.1 C28.1 C38.1 D1.1 D2.4 D2.17 D2.20 D2.24 D2.26 D2.33 X2.0 X2.1 X2.6 | length 13.6
  Top Layer w0.25: 9,8.6 9.198,8.798 D2.17@9.398,8.798 ; 9.049,8.1 9.049,8.449 D2.17@9.398,8.798 ; D2.33@9.9,10.4 9.433,9.933 9.433,9.566 9.398,9.531 D2.17@9.398,8.798 ; D2.20 D2.33@10.898,10.398 ; D2.33@11.398,12.802 C38.1@11.398,15.245 ; D2.33@12.204,10.496 D2.26 ; v1(12.5,10.4) 12.863,10.037 12.863,9.537 D2.24@12.9,9.5
  Top Layer w0.3: C28.1@8.3,6 8.349,5.951 8.349,5.1
  Top Layer w0.5: C27.1 C28.1@7.849,6.346 ; C25.1 C26.1@8.199,7.746 ; C28.1 7.899,7.645
  other v1: 0.9,0.899 9.499,0.9 16,0.899 8.5,3.8 5.599,4.9 13.3,6.899 5.599,7 7.899,7.3 6.3,7.7 16,7.9 8.599,9.1 14.4,9.299 9.8,10.4 4.6,10.499 11.3,11.8 7.5,11.9 4.8,12.599 9.8,13.1 12.5,13.1 7.399,13.9 10.6,15.5 16,15.5 0.9,15.7 8.299,18.3 16,18.4
KNOB_A: C20.2 D4.50 R21.1 | length 4.9
  Top Layer w0.25: R21.1 v1(6.74,49.296) 7.39,48.646 D4.50
  Bottom Layer w0.25: v1(6.74,49.296) C20.2
KNOB_B: C40.2 D4.51 R22.1 | length 4.6
  Top Layer w0.25: R22.1 5.54,48.146 D4.51
  Bottom Layer w0.25: v1(6.74,48.146) C40.2@8.34,48.146
KNOB_BTN: C41.2 D4.52 R23.1 | length 4.7
  Top Layer w0.25: R23.1 v1(6.74,46.896) 7.49,47.646 D4.52
  Bottom Layer w0.25: v1(6.74,46.896) C41.2@8.19,46.896
LCD_RESET: D3.16 D4.60 R41.1 | length 26.4
  Top Layer w0.25: D3.16 9.2,27.52 9.2,43.5 9.054,43.646 5.596,43.646 R41.1
LCD_SCL: D3.7 D4.44 R39.1 | length 29.5
  Top Layer w0.25: D3.7 3.28,34.3 5.184,34.3 6.55,35.666 6.55,41.05 v1(6.7,41.2) ; v1(5,45.7) R39.1 ; v1(11.9,50.1) 12.1,50.1 12.39,50.39 D4.44
  Bottom Layer w0.25: v1(5,45.7) 5.5,45.7 ; v1(6.7,41.2) 6.7,41.416 5.5,42.616 5.5,49.8 6.4,50.7 11.3,50.7 v1(11.9,50.1)
LCD_SDA: D3.8 D3.9 D4.43 R40.1 | length 31.6
  Top Layer w0.25: D3.9 7,35.48 7,40.6 7.4,41 7.4,41.7 v1(7.3,41.8) ; R40.1 6.2,44.6 v1(6.3,44.5) ; v1(12.1,49.2) 12.1,49.4 12.89,50.19 D4.43
  Bottom Layer w0.25: v1(7.3,41.8) 6.1,43 6.1,49.7 6.6,50.2 10.9,50.2 11.9,49.2 v1(12.1,49.2)
LED0: D4.55 R36.1 | length 18.4
  Top Layer w0.25: D4.55 9.354,46.146 9.7,45.8 9.7,34.5 v1(9.9,34.3) ; v1(14.5,34.5) 14.986,34.5 R36.1
  Bottom Layer w0.25: v1(9.9,34.3) 10.1,34.5 v1(14.5,34.5)
LED1: D4.54 R35.1 | length 19.5
  Top Layer w0.25: D4.54 9.554,46.646 10.2,46 10.2,41.5 v1(10.7,41) ; v1(10.9,38.6) 10.65,38.35 10.65,35.186 11.3,34.536 v1(11.3,33.1) ; v1(14.7,33.1) 14.797,33.197 R35.1
  Bottom Layer w0.25: v1(10.7,41) 10.7,38.8 v1(10.9,38.6) ; v1(11.3,33.1) v1(14.7,33.1)
LED2: D4.1 R34.1 | length 12.8
  Top Layer w0.25: D4.1 10.39,39.09 10.2,38.9 10.2,35 10.6,34.6 10.6,32.3 v1(10.4,32.1) ; v1@14.4,32 15.094,32 R34.1
  Bottom Layer w0.25: v1(10.4,32.1) 14.3,32.1 v1@14.4,32
  other v1: 14.5,32
LED3: D4.64 R33.1 | length 17.7
  Top Layer w0.25: v1(8.44,31.04) D4.64 ; v1@14.4,30.7 14.894,30.7 R33.1
  Bottom Layer w0.25: v1(8.44,31.04) 8.78,30.7 v1(14.5,30.7)
NetC1_2: C1.2 C3.2 C4.2 C12.2 C13.1 N1.20 V2.5 Z1.1 Z2.1 | length 60.3
  Top Layer w0.25: C13.1 N1.20@30.8,32.8
  Top Layer w0.4: C13.1 29.4,33.4 v1(29.8,33.4)
  Top Layer w0.8: Z2.1@47.8,7.7 53.45,7.7 54.275,8.525 C1.2 ; Z2.1@47.9,7.86 Z1.1 ; V2.5@54.5,21.1 54.5,16.5 C12.2 55.8,15 C1.2@55.8,11.4
  Bottom Layer w0.25: v1(29.8,33.4) 31.2,33.4 31.5,33.1 33.2,33.1 34,32.3 35.6,32.3 36.025,32.725 48.796,32.725 49.175,32.346 49.175,28.147 48.7,27.672 48.7,26.7 49.325,26.075 49.325,21.425 49.1,21.2 49.1,20.7 49.7,20.1 50.8,20.1
  other v1: 55.7,17.1 57.4,17.1 58.9,17.1 55.7,18.8 57.4,18.8 58.9,18.8 51.4,20.3 52.2,20.3 53,20.3 53.8,20.3 54.6,20.3 55.7,20.3 57.4,20.3 58.9,20.3 51.4,21.4 52.2,21.4 53,21.4 53.8,21.4 54.6,21.4 55.7,21.9 57.4,21.9 59,21.9 51.4,22.4 52.2,22.4 53,22.4 53.8,22.4 54.6,22.4 51.4,23.4 52.2,23.4 53,23.4 53.8,23.4 54.6,23.4 55.7,23.5 57.4,23.5 59,23.5 51.4,24.5 52.2,24.5 53,24.5 53.8,24.5 54.6,24.5 55.6,25.1 57.4,25.1 58.95,25.15
NetC5_1: C5.1 N1.2 | length 1.4
  Top Layer w0.25: C5.1@28.55,31.2 N1.2
NetC6_1: C6.1 N1.17 V1.2 | length 3.8
  Top Layer w0.25: N1.17 32.3,33.2 32.7,33.6 C6.1 34.45,35.1 V1.2
NetC6_2: C6.2 L1.1 N1.16 V2.1 V2.2 V2.3 V3.5 | length 35.4
  Top Layer w0.25: N1.16 33.45,32.6 C6.2 35.1,33.6 35.8,34.3 v1(35.8,34.4)
  Top Layer w0.8: V2.3@49.2,22 V2.2 V2.1 49.2,24.8 V3.5@50.9,26.5
  Top Layer w1.2: V3.5@54.4,30.8 L1.1@54.4,41.6
  Bottom Layer w0.3: v1(35.8,34.4) 36,34.2 49.5,34.2 50.8,32.9
  other v1: 55.9,26.3 57.4,26.3 58.9,26.3 51.4,26.6 52.2,26.6 53,26.6 53.8,26.6 54.6,26.6 51.4,27.7 52.2,27.7 53,27.7 53.8,27.7 54.6,27.7 55.9,27.8 57.4,27.8 58.9,27.8 51.4,28.7 52.2,28.7 53,28.7 53.8,28.7 54.6,28.7 51.4,29.7 52.2,29.7 53,29.7 53.8,29.7 54.6,29.7 55.9,29.7 57.4,29.7 58.9,29.7 51.4,30.8 52.2,30.8 53,30.8 53.8,30.8 54.6,30.8 55.9,31.5 57.4,31.5 58.9,31.5 51.4,33.3 53.5,33.3 55.4,33.3 57.4,33.3 58.9,33.3
NetC10_1: C10.1 N1.19 V1.1 | length 3.7
  Top Layer w0.25: C10.1 V1.1 ; C10.1@30.2,34.4 30.2,34.3 31.3,33.2 N1.19
NetC14_2: C14.2 R6.1 | length 1.1
  Top Layer w0.25: R6.1 C14.2
NetC16_1: C16.1 N1.9 R8.1 | length 10.2
  Top Layer w0.25: N1.9 32.3,28.3 C16.1@33.35,27.25 ; C16.1 33.6,27.1 v1(33.6,26.4)
  Bottom Layer w0.25: v1(33.6,26.4) 33.9,26.7 36.636,26.7 38.936,29 R8.1
NetC16_2: C16.2 N1.8 R7.1 | length 10.7
  Top Layer w0.25: C16.2@31.8,27.2 v1(32.5,27.2) v1@32.45,27.25 ; C16.2@31.8,27.4 N1.8
  Bottom Layer w0.25: v1(32.5,27.2) 36.5,27.2 39.4,30.1 R7.1
NetC18_2: C18.2 N1.6 | length 2.9
  Top Layer w0.25: C18.2 28.7,27.6 29.9,28.8 N1.6
NetC24_1: C24.1 L2.1 N3.6
NetC24_2: C24.2 N3.7 | length 1.2
  Bottom Layer w0.25: N3.7 19.001,8.748 C24.2
NetC25_2: C25.2 D2.16 | length 1.5
  Top Layer w0.25: C25.2@7.399,9.346 8.049,9.996 D2.16
NetC27_2: C27.2 X2.5 Z3.1 | length 7.9
  Top Layer w0.25: X2.5 5.396,10.096 4.9,9.6 4.9,6.545 C27.2 ; C27.2@6.649,4.896 Z3.1
NetC37_2: C37.2 D4.56 | length 2.9
  Top Layer w0.25: v1(7.4,45.9) 7.654,45.646 D4.56
  Bottom Layer w0.25: v1(7.4,45.9) 8.636,45.9 C37.2@8.64,45.896 ; C37.2@8.39,45.646 C37.2
NetC41_2: 
NetC41_2: 
NetC45_2: C45.2 R2.2 R24.2 | length 2.6
  Top Layer w0.25: R2.2 30,25.6 C45.2@30,24.85 ; C45.2 30.65,24.2 R24.2
NetC46_2: C46.2 N1.5 R32.2 | length 2.7
  Top Layer w0.25: R32.2 28.35,29.7 N1.5
NetD1_4: D1.4 R25.2 | length 2.5
  Top Layer w0.25: R25.2@14.909,14.259 D1.4
NetD1_8: D1.8 R26.1 | length 1.7
  Top Layer w0.25: D1.8 11.099,22.997 11.65,23.548 R26.1@11.9,23.548
NetD2_21: D2.21 H2.2 | length 1.4
  Top Layer w0.25: H2.2 11.398,8.245 D2.21
NetD2_22: D2.22 H1.2 | length 1.4
  Top Layer w0.25: D2.22 11.898,8.247 H1.2
NetD4_3: 
NetD4_4: 
NetD4_6: 
NetD4_8: 
NetD4_17: 
NetD4_18: 
NetD4_21: 
NetD4_27: 
NetD4_30: 
NetD4_32: 
NetD4_40: 
NetD4_42: 
NetD4_43: 
NetD4_45: 
NetD4_47: 
NetD4_53: 
NetD4_58: 
NetD4_61: D4.61
NetH1_1: H1.1 R17.1 | length 0.8
  Top Layer w0.25: R17.1 H1.1
NetH2_1: H2.1 R18.1 | length 0.8
  Top Layer w0.25: R18.1 H2.1
NetH3_1: H3.1 R33.2 | length 0.8
  Top Layer w0.25: R33.2 H3.1
NetH4_1: H4.1 R34.2 | length 0.8
  Top Layer w0.25: R34.2 H4.1
NetH5_1: H5.1 R35.2 | length 0.9
  Top Layer w0.25: R35.2 H5.1@17.597,33.197
NetH6_1: H6.1 R36.2 | length 0.8
  Top Layer w0.25: R36.2 H6.1@17.489,34.297
NetL1_2: L1.2 R4.1 R7.2 | length 12.9
  Top Layer w0.25: R4.1 v1(41.9,30.2)
  Top Layer w1.2: R4.1 L1.2@41,41.6
  Bottom Layer w0.25: R7.2 41.45,30.2 v1(41.9,30.2)
NetN1_1: N1.1 R1.2 R27.2 V6.3 | length 24
  Top Layer w0.25: v1(21.2,31.8) 21.4,31.6 21.4,26.1 v1(22.2,25.3)
  Bottom Layer w0.25: R1.2@19.451,22.299 R27.2 V6.3 ; v1(21.2,31.8) 21.4,31.6 29.6,31.6 v1(29.9,31.9) ; v1(22.2,25.3) 22.2,24.9 22.9,24.2 22.9,22.299
NetN1_7: N1.7 R2.1 R11.1 | length 2.8
  Top Layer w0.25: R2.1 R11.1 30.9,27.6 31.3,28 N1.7
NetN1_10: N1.10 R6.2 | length 2.3
  Top Layer w0.25: N1.10 33.3,28.8 34.4,27.7 R6.2
NetN1_12: N1.12 R3.2 | length 1.1
  Top Layer w0.25: N1.12 34.35,30.2 R3.2
NetN1_15: N1.15 V2.4 | length 29.7
  Top Layer w0.25: N1.15 34.1,31.7 v1(35.4,33) ; V2.4 49.44,20.54 v1(49.8,20.9)
  Bottom Layer w0.3: v1(35.4,33) 35.6,33.2 48.993,33.2 49.65,32.543 49.65,27.95 49.2,27.5 49.2,26.9 49.8,26.3 v1(49.8,20.9)
NetN1_18: N1.18 V3.4 | length 26.5
  Top Layer w0.25: N1.18 v1(31.8,33.8) ; V3.4 49.64,26.84 v1(49.9,27.2)
  Bottom Layer w0.3: v1(31.8,33.8) 31.9,33.7 49.2,33.7 50.15,32.75 50.15,27.45 v1(49.9,27.2)
NetN3_10: N3.10 R16.2 | length 1.1
  Bottom Layer w0.25: R16.2@16.376,9.573 N3.10
NetN6_1: N6.1 R29.1 R30.2 | length 2.2
  Bottom Layer w0.25: R30.2 R29.1 20.75,17.849 N6.1
NetN6_2: N6.2 R28.1 V6.1 | length 5.5
  Bottom Layer w0.25: V6.1 N6.2 22.85,19.749 23.25,20.149 R28.1
NetR19_1: R19.1 R20.1 X3.1 | length 3.3
  Top Layer w0.25: R20.1 X3.1@20.99,58.046
NetR21_2: R21.2 X4.1 | length 3.6
  Top Layer w0.25: X4.1 3.99,50.146 R21.2
NetR22_2: R22.2 X4.2 | length 2.6
  Top Layer w0.25: X4.2 3.5,48.096 R22.2
NetR23_2: R23.2 X4.3 | length 2
  Top Layer w0.25: X4.3 2.16,46.896 R23.2
NetU1_1: 
NetU1_2: 
NetU1_3: 
NetU1_5: 
PGEC: D4.49 X3.5 | length 10
  Top Layer w0.25: D4.49 8.44,55.656 X3.5
PGED: D4.48 X3.4 | length 8.3
  Top Layer w0.25: D4.48 10.39,55.066 X3.4
PIC_AVDD: C34.2 D4.19 L3.2 | length 3
  Top Layer w0.25: v1(18.9,42.6) 18.946,42.646 D4.19
  Bottom Layer w0.25: v1(18.9,42.6) 19.286,42.6 C34.2
  Bottom Layer w0.5: L3.2 19.74,41.696 C34.2
PIC_VDD: C29.2 C30.2 C31.2 C32.2 C36.2 D4.10 D4.26 D4.38 D4.57 L3.1 Z4.1 | length 36.2
  Top Layer w0.25: v1(7.4,44.9) 7.646,45.146 D4.57 ; D4.10 14.89,40.41 v1(14.6,40.7) 14.8,40.9 14.8,45.8 15.364,46.364 15.6,46.6 ; v1@15.39,50.29 D4.38 ; v1(15.4,50.3) 15.3,50.2 15.3,46.9 15.6,46.6 ; v1(18.8,46.6) 15.6,46.6 ; D4.26 20.59,46.146 v1@20.64,46.096
  Bottom Layer w0.25: v1(7.4,44.9) 7.4,44.486 C30.2 ; v1(14.6,40.7) 15.39,39.91 C32.2 ; C29.2 v1(15.4,50.3) ; v1(18.8,46.6) C31.2@19.694,46.6 ; C31.2 20.154,46.646 v1(20.7,46.1)
  Bottom Layer w0.4: C30.2 8.39,42.81 9.2,42 13.3,42 v1(14.6,40.7)
  Bottom Layer w0.5: C32.2 C36.2@17.36,39.796 ; C36.2 19.14,39.896 L3.1 ; Z4.1 C36.2@17.45,39.886
RX: D1.6 D4.11 | length 18.9
  Top Layer w0.25: v1(12.7,28.8) 12.9,29 12.9,36.1 15.39,38.59 D4.11 ; v1(13.1,27.3) 13.1,25.6 13.639,25.061 D1.6
  Bottom Layer w0.25: v1(12.7,28.8) 12.7,27.7 v1(13.1,27.3)
RX_ISO: D2.30 R25.1 | length 1.3
  Top Layer w0.25: D2.30 14.646,12.496 R25.1
TX: D4.12 R26.2 | length 16.3
  Top Layer w0.25: R26.2@11.9,25.048 11.9,27.1 13.35,28.55 13.35,35.85 15.89,38.39 D4.12
TX_ISO: D1.2 D2.2 R38.1 | length 4.5
  Top Layer w0.25: v1(12.3,17.9) 12.369,17.831 D1.2 ; D2.2 D1.2@12.398,16.767
  Bottom Layer w0.25: R38.1@12.3,17 v1(12.3,17.9)
USBD+: D2.14 X2.3 | length 2.7
  Top Layer w0.25: X2.3 7.099,11.396 7.499,10.996 D2.14
USBD-: D2.15 X2.4 | length 2.6
  Top Layer w0.25: X2.4 7.049,10.746 7.299,10.496 D2.15
VIN: C47.1 R5.2 R10.1 V4.1 X6.2 | length 18.5
  Top Layer w0.25: R5.2@38.9,14.1 v1(39.9,15.1)
  Top Layer w0.8: X6.2 32.5,6.24 32.5,7.85 V4.1@39.05,7.85 ; R5.2 38.7,8.2 V4.1
  Bottom Layer w0.25: v1(39.9,15.1) R10.1@39.9,15.85
VOUT: C7.2 C8.2 C11.2 C15.2 C47.2 R4.2 R8.2 R11.2 R15.2 V4.2 X6.1 | length 64.6
  Top Layer w0.25: v1(23,37.3) 22.79,37.09 22.79,26.983 23.873,25.9 v1(24.2,25.9) ; R11.2 31.6,25.8 v1(31.7,25.7) ; v1(43.2,30.2) R4.2
  Top Layer w0.8: X6.1 30.9,6.1 30.9,8.8 36.06,13.96 V4.2 37.7,16.761 C15.2 ; C15.2@37.5,20.8 C11.2 ; C11.2@44.2,27.7 R4.2
  Bottom Layer w0.25: R15.2 18.95,37.3 v1(23,37.3) ; v1(24.2,25.9) 24.4,25.9 24.9,25.4 33.123,25.4 35.923,22.6 v1(36.2,22.6) ; 31.7,25.4 v1(31.7,25.7) ; R8.2 42,29 v1(43.2,30.2)
VREF: C35.2 D4.35 N5.2 | length 2.9
  Top Layer w0.25: D4.35 16.89,51.89 v1(16.9,51.9)
  Bottom Layer w0.25: C35.2@16.9,51.206 v1(16.9,51.9)
  Bottom Layer w0.5: C35.2 16.89,49.996 N5.2
pads on no net: D2.3 D2.5 D2.6 D2.7 D2.8 D2.9 D2.10 D2.11 D2.12 D2.13 D2.18 D2.23 D2.25 D2.27 D2.28 D2.29 D2.31 D2.32 D3.20 D4.2 D4.3 D4.4 D4.5 D4.6 D4.8 D4.16 D4.17 D4.18 D4.21 D4.24 D4.27 D4.30 D4.31 D4.32 D4.33 D4.34 D4.36 D4.37 D4.39 D4.40 D4.42 D4.45 D4.46 D4.47 D4.53 D4.58 D4.59 D4.62 D4.63 E1.0 E2.0 E3.0 E4.0 N1.3 N3.3 N3.9 X2.2 X3.6

## Polygon pours and split planes (outlines as drawn)
GND on Top Layer (hatched 90Degree grid 0 track 0.3, remove dead copper): 59.3,59.301 59.3,0.701 34.4,0.701 34.4,21.301 32.5,23.201 32.5,0.701 17.4,0.701 17.4,20.001 6.6,20.001 6.6,17.301 0.7,17.301 0.7,59.301 24.7,59.301 24.7,47.901 26.4,46.201 26.4,37.401 24.8,35.801 24.8,32.301 25.8,32.301 25.8,35.801 27.3,37.301 27.3,59.301
GNDI on Top Layer (hatched 90Degree grid 0.3 track 0.3, remove dead copper): 7.9,18.7 16.2,18.7 16.2,12.9 14.5,12.9 14.5,8.1 16.2,8.1 16.2,0.7 0.7,0.7 0.7,15.9 7.9,15.9
GND on Bottom Layer (hatched 90Degree grid 0 track 0.3, remove dead copper): 59.3,59.3 59.3,0.7 34.4,0.7 34.4,21.3 32.5,23.2 32.5,0.7 17.4,0.7 17.4,20 6.6,20 6.6,17.3 0.7,17.3 0.7,59.3 24.7,59.3 24.7,47.9 26.4,46.2 26.4,37.4 24.8,35.8 24.8,32.3 25.8,32.3 25.8,35.8 27.3,37.3 27.3,59.3
+5V on Bottom Layer (hatched 90Degree grid 0.3 track 0.3, remove dead copper): 18.2,10 18.2,2 27.6,2 27.6,6.8 26.1,6.8 26.1,10
GNDI on Bottom Layer (hatched 90Degree grid 0.3 track 0.3, remove dead copper): 7.9,18.7 16.2,18.7 16.2,13.3 14.5,13.3 14.5,8.1 16.2,8.1 16.2,0.7 0.7,0.7 0.7,15.9 7.9,15.9

## Other copper
Top Layer:
  rectangle net VOUT: 44.2,29.4 45.8,31.1
  region net NetC6_2: 59.3,33.7 50.5,33.7 50.5,25.8 59.3,25.8
  region net NetC1_2: 59.3,25.5 51,25.5 51,19.9 59.3,19.9
  region net NetC1_2: 59.3,20.1 55.4,20.1 55.4,16.7 59.3,16.7
  text ".Layer_Name" at 76,42 h1.52
Bottom Layer:
  rectangle net NetC1_2: 50.5,19.9 59.3,25.5
  rectangle net GND: 19.2,10.2 20.2,11.8
  region net NetC24_1: 19.401,9.898 19.401,9.198 21.101,9.198 21.101,9.898
  region net NetC24_1: 20.101,9.898 20.101,2.998 21.101,2.998 21.101,9.898
  rectangle net NetC6_2: 50.5,25.8 59.3,33.7
  region net NetC1_2: 59.3,21 55.4,21 55.4,16.7 59.3,16.7
  text "PV Simulator" at 42.5,57.499 h1.1
  text "BAT6" at 50.599,57.1 h1.52
  text "FHNW P3 2015" at 42.5,55.499 h1.1
  text "Alex Murray" at 42.5,53.499 h1.1
  text "Raphael Frey" at 42.5,51.499 h1.1
  text "Reto Freivogel" at 42.5,49.499 h1.1
  text ".Layer_Name" at 76,42 h1.52

## Silkscreen, mask and mechanical layers (free items; w line width, h text height)
Top Overlay:
  text ".Layer_Name" at 76,40 h1.52
Bottom Overlay:
  text ".Layer_Name" at 76,40 h1.52
Top Paste:
  text ".Layer_Name" at 76,38 h1.52
Bottom Paste:
  text ".Layer_Name" at 76,38 h1.52
Top Solder:
  text ".Layer_Name" at 76,36 h1.52
Bottom Solder:
  rectangle: 55.4,16.7 59.3,20
  rectangle: 50.5,19.9 59.3,25.5
  rectangle: 50.5,25.8 59.3,33.7
  lines w0.254: 32.496,22.35 cw(c32.85,22.35) 33.133,22.562 ; 32.6,22.5 cw(c32.8,22.5) 33,22.5
  text ".Layer_Name" at 76,36 h1.52
Drill Guide:
  text ".Layer_Name" at 76,34 h1.52
Mechanical 1:
  the board outline again, w0.1
  text ".Layer_Name" at 76,44 h1.52
Drill Drawing:
  text ".Legend" at 77,2 h1.52

## Dimensions
60,0 to 60,60 on Mechanical 1
60,0 to 57,57 on Mechanical 1
60,0 to 57,3 on Mechanical 1
0,0 to 60,0 on Mechanical 1
0,0 to 57,3 on Mechanical 1
0,0 to 3,3 on Mechanical 1